# Altium PCB PCB模版.PcbDoc
Units mm, origin at the board's own origin, x right, y up, seen from the top; angles counter-clockwise.
Board outline 122.4 x 87.4 mm, 2 copper layers (Top Layer, Bottom Layer); 90 components, 1 nets, 321 pads, 148 vias.
Unrouted connection lines stored in the file: 96.
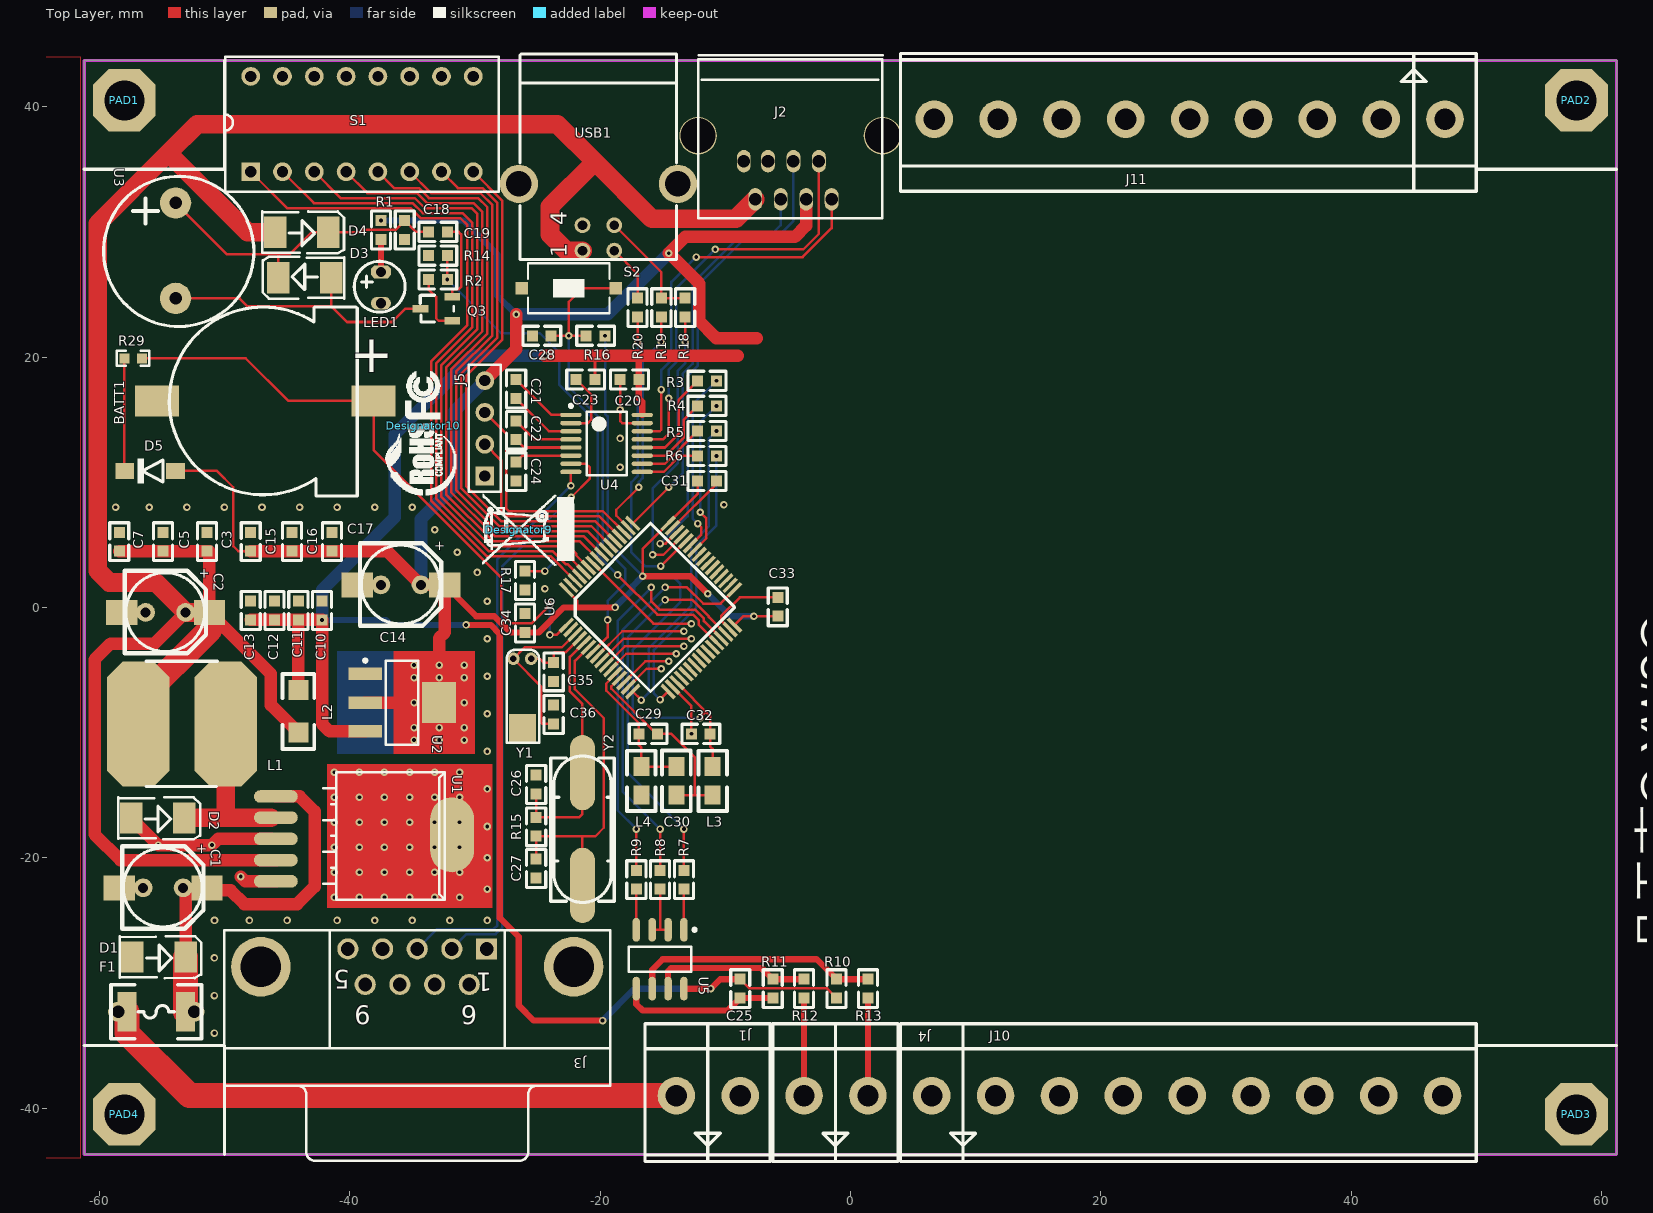
[diagram p0: Top Layer view]
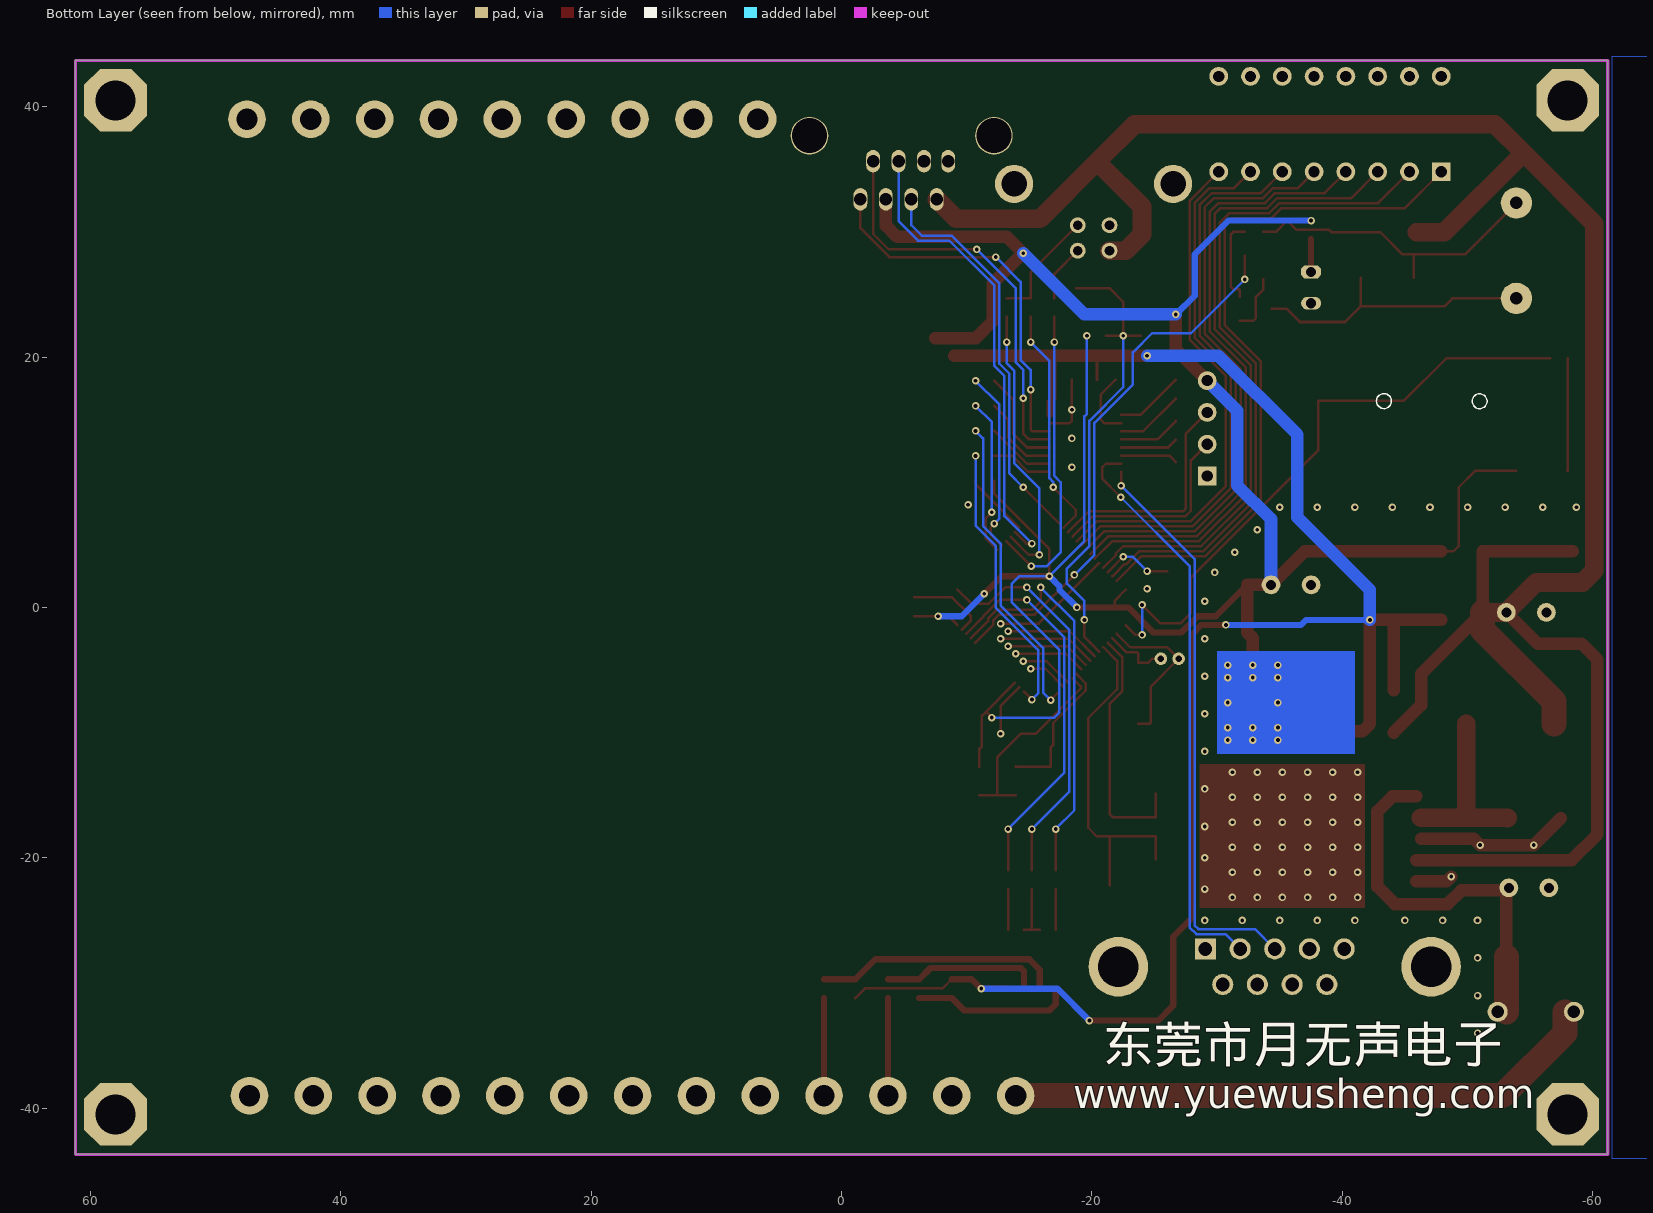
[diagram p1: Bottom Layer view, seen from below]

## Layer stack, top to bottom
Top Layer: signal copper 0.0356
Dielectric: dielectric 0.32, FR-4, Dk 4.8
Bottom Layer: signal copper 0.0356

## Board outline
-61.2,-43.7 61.2,-43.7 61.2,43.7 -61.2,43.7

## Design rules (kind name [scope] priority, off if disabled: settings)
Clearance [(InPadClass('All Pads')) vs InPolygon] p1: gap=0.3
Clearance Clearance_1 [All] p2: gap=0.2
ComponentClearance [All] p1 off: gap=0.254 collisioncheckmode=3 verticalgap=0.254 showdistances=FALSE
PlaneConnect [All] p1: planeconnectstyle=Relief reliefexpansion=0 reliefentries=4 reliefconductorwidth=0.3 reliefairgap=0.508
PolygonConnect PolygonConnect_1 [All vs IsComponentPad] p1: connectstyle=Relief reliefconductorwidth=0.3 reliefentries=4 polygonreliefangle="90 Angle" airgapwidth=0.3
PolygonConnect [All] p2: connectstyle=Direct reliefconductorwidth=0.3 reliefentries=4 polygonreliefangle="90 Angle" airgapwidth=0.3
RoomDefinition 八进八出 [InComponentClass('八进八出')] p1: confinementstyle=ConfineIn formatcopy=TRUE lockcomponents=FALSE outline -62,-44.5 62,-44.5 62,44.5 -62,44.5
RoutingVias [All] p1: holewidth=0.3 width=0.6 viastyle="Through Hole" minholewidth=0.3 minwidth=0.6 maxholewidth=0.3 maxwidth=0.6
SolderMaskExpansion [All] p1: expansion=0.102
Width [All] p1: maxlimit=2 minlimit=0.16 preferedwidth=0.2 minimp=50.000000 maximp=50.000000 favimp=50.000000
26 further rules are at their usual default settings.

## Components (designator, comment, footprint, x,y, rotation, side; value= is the part's Value field where it differs from the comment)
BATT1 "CR1220" MINI-BAT -38.1,16.5 r180 top
C1 "680UF/50V" 电解电容 -54.9,-22.4 r0 top (schematic designator C34)
C2 "220UF/25V" 电解电容 -54.7,-0.4 r0 top (schematic designator C32)
C3 "104" 0603A -51.4,6 r270 top (schematic designator C18)
C5 "104" 0603A -54.9,6 r270 top (schematic designator C20)
C7 "104" 0603A -58.4,6 r270 top (schematic designator C22)
C10 "104" 0603A -42.2,-1 r90 top (schematic designator C25)
C11 "104" 0603A -44.1,-1 r90 top (schematic designator C26)
C12 "104" 0603A -46,-1 r90 top (schematic designator C27)
C13 "14" 0603A -47.9,-1 r90 top (schematic designator C28)
C14 "470UF" 电解电容 -35.9,1.8 r0 top (schematic designator C33)
C15 "104" 0603A -47.9,4.5 r90 top (schematic designator C29)
C16 "104" 0603A -44.6,4.5 r90 top (schematic designator C30)
C17 "104" 0603A -41.4,4.5 r90 top (schematic designator C31)
C18 "104" 0603A -35.6,30.9 r270 top
C19 "104" 0603A -33.7,30 r0 top
C20 "CAP" 0603A -16.9,18.2 r180 top
C21 "104" 0603A -26.7,18.2 r270 top
C22 "104" 0603A -26.7,13.4 r90 top
C23 "104" 0603A -21.9,18.2 r0 top
C24 "104" 0603A -26.7,11.6 r270 top
C25 "CAP" 0603A -8.8,-31.2 r90 top
C26 "15" 0603A -25.1,-14.9 r90 top
C27 "15" 0603A -25.1,-20.1 r270 top
C28 "104" 0603A -23.9,21.7 r180 top
C29 "104" 0603A -16.9,-10.1 r0 top
C30 "1uF" 0805 -13.9,-12.7 r270 top
C31 "104" 0603A -12.2,10.1 r0 top
C32 "104" 0603A -11.2,-10.1 r180 top
C33 "104" 0603A -5.8,-0.7 r90 top
C34 "104" 0603A -26,-2 r90 top
C35 "15" 0603A -23.7,-5.9 r90 top
C36 "15" 0603A -23.7,-7.8 r270 top
D1 "5819" 贴片二极管 -51.8,-28 r0 top (schematic designator D3)
D2 "IN5824" 贴片二极管 -51.9,-16.9 r0 top
D3 "4148" 贴片二极管 -47,26.4 r180 top
D4 "5819" 贴片二极管 -40.4,29.9 r0 top
D5 "4148" DIODE_SOP -53.9,10.9 r180 top
Designator9 "" HS -26.5,6.2 r90 top
Designator10 "" fc -34.1,14.5 r90 top
F1 "3A" 自恢复保险丝 -57.8,-32.3 r0 top
J1 "CON2" CON2*5.1 -13.9,-39 r180 top
J2 "CON8" "od-rj45 - duplicate" -1.5,32.6 r180 top
J3 "D Connector 9" DSUB1.385-2H9 -34.6,-38.2 r180 top
J4 "CON2" CON2*5.1 -3.7,-39 r180 top
J5 "USART" HDR1X4 -29.2,10.5 r90 top
J10 "CON9" CON9*5.1 6.5,-39 r180 top
J11 "CON9" CON9*5.1 47.5,39 r0 top
L1 "33UH" SMD-100 -53.4,-9.3 r0 top (schematic designator L2)
L2 "100UH" 1206C -44.1,-6.6 r270 top (schematic designator L1)
L3 "100uH" 0805 -11,-12.714 r270 top
L4 "100uH" 0805 -16.7,-15 r90 top
LED1 "LED" LED2.5 -37.5,26.8 r90 top
PAD1 "PAD" PAD -58,40.5 r0 top
PAD2 "PAD" PAD 58,40.5 r0 top
PAD3 "PAD" PAD 58,-40.5 r0 top
PAD4 "PAD" PAD -58,-40.5 r0 top
Q3 "9013" SOT23 -31.8,22.9 r90 top
R1 "1K" 0603A -37.5,30.9 r270 top
R2 "1K" 0603A -32.2,26.2 r180 top
R3 "33" 0603A -10.7,18.1 r180 top
R4 "33" 0603A -10.7,16.1 r180 top
R5 "33" 0603A -10.7,14.1 r180 top
R6 "33" 0603A -10.7,12.1 r180 top
R7 "33" 0603A -13.3,-21 r270 top
R8 "33" 0603A -15.2,-21 r270 top
R9 "33" 0603A -17.1,-21 r270 top
R10 "100K" 0603A -1.1,-29.7 r270 top
R11 "100K" 0603A -6.2,-29.7 r270 top
R12 "33" 0603A -3.7,-29.7 r270 top
R13 "33" 0603A 1.4,-29.7 r270 top
R14 "103" 0603A -33.7,28.1 r0 top (schematic designator R25)
R15 "105" 0603A -25.1,-16.776 r270 top (schematic designator R22)
R16 "103" 0603A -19.6,21.7 r180 top (schematic designator R23)
R17 "103" 0603A -26,1.4 r90 top (schematic designator R24)
R18 "10" 0603A -13.2,24.7 r270 top
R19 "1.5K" 0603A -15.1,23.2 r90 top
R20 "10" 0603A -17,23.2 r90 top
R29 "1.5K" 0603P -56.6,19.9 r180 top
S1 "SW DIP-8" DIP-16-KEY -47.9,34.8 r0 top
S2 "RESRT" SW-PB2 -22.5,25.5 r180 top
U1 "LM2596" TO-263-5 -45.2,-15.1 r270 top (schematic designator U97)
U2 "SP1117" SOT223 -35.8,-7.6 r0 top (schematic designator U98)
U3 "蜂鸣器" 蜂鸣器 -53.9,28.5 r90 top
U4 "SP3232" TSSOP16 -19.476,13.1 r0 top
U5 "SP485" SO8_L -15.2,-28.1 r270 top
U6 "stm32f1xRxT" LQFP64 -24.1,0 r45 top
USB1 "USB" USB-B3 -21.4,28.5 r90 top
Y1 "32768" XL32 -25.5,-4.1 r270 top
Y2 "25M" XTALV-49USMD -21.4,-22.2 r90 top

## Footprints (in the part's own frame and the unit in brackets; to place one, negate y for a bottom-side part, rotate by r counter-clockwise, add the part's x,y. Pads: shape width x height; smd on the part's side, far side on the other; paste and mask are expansions set on the pad)
0603A [mm]
  rect 0.88x0.88 smd: 1(0,0) 2(1.5,0)
  silkscreen extent -0.76,-0.76 2.26,0.76
0603P [mm]
  rect 0.8x0.8 smd: 1(0,0) 2(1.4,0)
  silkscreen extent -0.6,-0.6 2,0.6
0805 [mil]
  rect 60x50 smd: 1(0,0) 2(90,0)
  silkscreen extent -50,-45 140,45
1206C [mm]
  rect 1.6x1.6 smd: 1(0,0) 2(3.4,0)
  silkscreen extent -1.27,-1.27 4.7,1.27
CON2*5.1 [mm]
  round 3 hole 1.7: 1(0,0) 2(-5.1,0)
  silkscreen extent -7.5,-5.75 2.5,5.25
CON9*5.1 [mm]
  round 3 hole 1.7: 1(0,0) 2(-5.1,0) 3(-10.2,0) 4(-15.3,0) 5(-20.4,0) 6(-25.5,0) 7(-30.6,0) 8(-35.7,0) 9(-40.8,0)
  silkscreen extent -43.5,-5.75 2.5,5.25
DIODE_SOP [mm]
  rect 1.5x1.3 smd: 1(0,0) 2(4.064,0)
  silkscreen extent 1.02,-1.02 3.05,1.02
DIP-16-KEY [mm] "DIP; 16 Leads; Row Spacing 7.62 mm; Pitch 2.54 mm"
  rect 1.5x1.5 hole 0.9: 1(0,0)
  round 1.5 hole 0.9: 2(2.54,0) 3(5.08,0) 4(7.62,0) 5(10.16,0) 6(12.7,0) 7(15.24,0) 8(17.78,0) 9(17.78,7.62) 10(15.24,7.62) 11(12.7,7.62) 12(10.16,7.62) 13(7.62,7.62) 14(5.08,7.62) 15(2.54,7.62) 16(0,7.62)
  silkscreen extent -2.05,-1.59 19.83,9.2
DSUB1.385-2H9 [mm] "Connector; D Subminiature; 9 Position; Right Angle; Pitch 1.385 mm"
  rect 1.69x1.69 hole 1.09: 1(-5.54,-10.92)
  round 1.69 hole 1.09: 2(-2.77,-10.92) 3(0,-10.92) 4(2.77,-10.92) 5(5.54,-10.92) 6(-4.155,-8.08) 7(-1.385,-8.08) 8(1.385,-8.08) 9(4.155,-8.08)
  round 4.76 hole 3.26: 10(-12.495,-9.5) 11(12.495,-9.5)
  silkscreen extent -15.4,-12.4 15.4,6
fc [mm]
  silkscreen extent -5.53,-2.62 4.36,3
HDR1X4 [mm] "Connector; Header; 4 Position"
  rect 1.5x1.5 hole 0.9: 1(0,0)
  round 1.5 hole 0.9: 2(2.54,0) 3(5.08,0) 4(7.62,0)
  silkscreen extent -1.27,-1.27 8.89,1.27
HS [mm]
  silkscreen extent -2.87,-4.39 2.87,2.87
LED2.5 [mil]
  oct 40x63 hole 32: A(0,0)
  oval 40x63 hole 32: K(-98.42,0)
  silkscreen extent -126,-76 34,84
LQFP64 [mm]
  rect 1.5x0.3 smd: 1(0,-2) 2(0,-2.5) 3(0,-3) 4(0,-3.5) 5(0,-4) 6(0,-4.5) 7(0,-5) 8(0,-5.5) 9(0,-6) 10(0,-6.5) 11(0,-7) 12(0,-7.5) 13(0,-8) 14(0,-8.5) 15(0,-9) 16(0,-9.5) 33(11.5,-9.5) 34(11.5,-9) 35(11.5,-8.5) 36(11.5,-8) 37(11.5,-7.5) 38(11.5,-7) 39(11.5,-6.5) 40(11.5,-6) 41(11.5,-5.5) 42(11.5,-5) 43(11.5,-4.5) 44(11.5,-4) 45(11.5,-3.5) 46(11.5,-3) 47(11.5,-2.5) 48(11.5,-2)
  rect 0.3x1.5 smd: 17(2,-11.5) 18(2.5,-11.5) 19(3,-11.5) 20(3.5,-11.5) 21(4,-11.5) 22(4.5,-11.5) 23(5,-11.5) 24(5.5,-11.5) 25(6,-11.5) 26(6.5,-11.5) 27(7,-11.5) 28(7.5,-11.5) 29(8,-11.5) 30(8.5,-11.5) 31(9,-11.5) 32(9.5,-11.5) 49(9.5,0) 50(9,0) 51(8.5,0) 52(8,0) 53(7.5,0) 54(7,0) 55(6.5,0) 56(6,0) 57(5.5,0) 58(5,0) 59(4.5,0) 60(4,0) 61(3.5,0) 62(3,0) 63(2.5,0) 64(2,0)
  silkscreen extent 1,-10.5 10.5,-1
MINI-BAT [mm]
  rect 3.5x2.5 smd: 1(-0.01,0.007) 2(17.29,0.007)
  silkscreen extent 1.29,-7.49 16.31,7.61
"od-rj45 - duplicate" [mm]
  oval 1.1x1.8 hole 1: 1(0,0) 2(1.016,-3.048) 3(2.032,0) 4(3.048,-3.048) 5(4.064,0) 6(5.08,-3.048) 7(6.096,0) 8(7.012,-3.048)
  round 3 hole 2.8: 8(-4.064,-5.08) 8(10.668,-5.08)
  silkscreen extent -4.1,-11.53 10.67,1.52
PAD [mm]
  oct 5x5 hole 3.2: 1(0,0)
SMD-100 [mm]
  oct 5x10 smd: 1(-3.5,0) 2(3.5,0)
  silkscreen extent -2.85,-5 2.84,5
SO8_L [mm] "SOIC, 8-Leads, Body 4.9x3.9mm, Pitch 1.27mm, IPC High Density"
  oval 1.9x0.6 smd: 1(-2.35,1.905) 2(-2.35,0.635) 3(-2.35,-0.635) 4(-2.35,-1.905) 5(2.35,-1.905) 6(2.35,-0.635) 7(2.35,0.635) 8(2.35,1.905)
  silkscreen extent -2.47,-2.5 1,2.88, body extent -2,-2.5 2,2.5, height 1.75
SOT23 [mm]
  rect 0.6x1.27 smd: 1(0,0) 2(1.905,0) 3(0.965,2.54)
  silkscreen extent -0.11,-0.13 2.04,2.56
SOT223 [mm] "SOT223, 4-Leads, Body 6.5x3.5mm, Pitch 2.3mm, Lead Span 7mm, IPC Low Density"
  rect 2.7x1 smd: 1(-2.95,2.3) 2(-2.95,0) 3(-2.95,-2.3)
  rect 2.7x3.3 smd: 4(2.95,0)
  silkscreen extent -3.07,-3.35 1.3,3.47, body extent -1.85,-3.35 1.85,3.35, height 1.7
SW-PB2 [mm]
  rect 1x1 smd: 1(-3.75,0) 2(3.75,0)
  silkscreen extent -3.25,-2 3.25,2
TO-263-5 [mm]
  oval 1x3.5 smd: 1(0,-0.691) 2(1.693,-0.691) 3(3.387,-0.691) 4(5.08,-0.691) 5(6.773,-0.691)
  oval 6x3.5 smd: 3(3.064,13.384)
  silkscreen extent -1.93,3.08 8.23,12.8
TSSOP16 [mm] "TSOP, 16-Leads, Body 5x4.4mm, Pitch 0.65mm, IPC Medium Density"
  oval 1.7x0.35 smd: 1(-2.85,2.275) 2(-2.85,1.625) 3(-2.85,0.975) 4(-2.85,0.325) 5(-2.85,-0.325) 6(-2.85,-0.975) 7(-2.85,-1.625) 8(-2.85,-2.275) 9(2.85,-2.275) 10(2.85,-1.625) 11(2.85,-0.975) 12(2.85,-0.325) 13(2.85,0.325) 14(2.85,0.975) 15(2.85,1.625) 16(2.85,2.275)
  silkscreen extent -2.97,-2.55 1.6,3.12, body extent -2.25,-2.55 2.25,2.55, height 1.1
USB-B3 [mil]
  round 50 hole 30: 1(0,0) 2(0,-100) 3(80,-100) 4(80,0)
  round 120 hole 80: 5(210,200) 6(210,-300)
  silkscreen extent -28,-295 618,197
XL32 [mm]
  round 1 hole 0.5: 1(0,0) 2(0,-1.422)
  rect 2.34x2.184 smd: ""(5.588,-0.686)
  silkscreen extent -0.71,-1.96 6.71,0.64
XTALV-49USMD [mm]
  oval 6x2 smd: 1(0,0) 2(9,0)
  silkscreen extent -1.37,-2.54 10.33,2.54
电解电容 [mm]
  round 1.5 hole 0.8: 1(1.6,0) 2(-1.6,0)
  rect 2.5x2 smd: 1(3.5,0) 2(-3.5,0)
  silkscreen extent -3.27,-3.27 3.22,3.33
自恢复保险丝 [mm]
  round 1.6 hole 1: 1(-0.7,0) 2(5.4,0)
  rect 1.524x3.175 smd: 1(0,0) 2(4.699,0)
  silkscreen extent -1.27,-2.16 5.97,2.16
蜂鸣器 [mm]
  round 2.5 hole 1: 1(3.81,0) 2(-3.81,0)
  silkscreen extent -6.06,-6.25 5.94,5.75
贴片二极管 [mm]
  rect 1.8x2.5 smd: A(-5.55,0.075) K(-1.3,0.075)
  silkscreen extent -6.58,-1.61 -0.05,1.73

## Part data
BATT1: library part Battery
C1 C2 C14: library part "CAPACITOR POL", "Capacitor"
C3 C5 C7 C10 C11 C12 C13 C15 C16 C17 C18 C19 C21 C22 C23 C24 C28 C31 C32 C33 C34: library part CAP, "Capacitor"
C20 C25: "Capacitor"
C26 C27 C29 C30 C35 C36: library part C
D1 D3 D4: library part 二极管
D2: library part 肖特基二极管
D5: library part D, "1N4148"
Designator9 Designator10: library part PAD
F1: library part "Fuse 1", "Fuse"
J3: "Receptacle Assembly, 9 Position, Right Angle"
J5: library part "Header 4", "Header, 4-Pin"
L1 L2: library part L1
L3 L4 R18 R19 R20 R29: library part R
Q3: library part NPN
R1 R2 R3 R4 R5 R6 R7 R8 R9 R10 R11 R12 R13 R14 R15 R16 R17: library part RES2
S1: "DIP Switch, 8 Position, SPST"
S2: library part SW-PB
U4: library part SP3232EEA
USB1: library part "HEADER 3X2"
Y1 Y2: library part XTAL, "Crystal Oscillator"

## Via types
v1: diameter 0.6, hole 0.3, Top Layer to Bottom Layer, 148 vias

## Nets (pads, with @x,y where several pads share a name; then routed paths per layer and width w, separated by ;. In a path a pad name is that pad's centre, name@x,y a point inside that pad or via, vN(x,y) a via of type N, cw(c..) or ccw(c..) an arc to the next point about the centre after c; other vN are vias at no path point)
GND: BATT1.2 C1.2 C2.2 C3.1 C5.1 C7.1 C10.2 C11.2 C12.2 C13.2 C14.2 C15.2 C16.2 C17.2 C18.2 C19.2 C20.2 C24.2 C25.1 C26.2 C27.2 C28.2 C31.2 C32.2 C33.2 C34.2 C35.1 C36.1 D1.A D2.A J1.2 J2.6 J2.8 J3.5 J3.10 J3.11 J5.1 J10.9 J11.1 L4.1 LED1.K PAD1.1 PAD2.1 PAD3.1 PAD4.1 Q3.2 R11.2 R14.1 R17.1 S1.9 S1.10 S1.11 S1.12 S1.13 S1.14 S1.15 S1.16 S2.2 U1.3 U1.5 U2.1 U4.15 U5.5 U6.18 U6.31 U6.47 U6.63 USB1.4 USB1.5 USB1.6 | length 55.9
  Top Layer w0.2: C19.2 -31.3,30 -31.1,29.8 -31.1,25.6 -31.3,25.4 -31.76,25.4 -31.8,25.36 Q3.2 ; C20.2 -18.4,14.9 -18.225,14.725 U4.15 ; U6.18 -12.7,-7.864 v1(-12.7,-10.1) ; U6.47 -10.7,9.864 C31.2 ; U6.31 -10.328,-1.044 -10.328,-0.7 -8.828,0.8 C33.2
  Top Layer w0.5: U5.5 -17.105,-31.695 -16.6,-32.2 -9.8,-32.2 C25.1 R11.2
  Top Layer w1: D2.A v1(-55.295,-18.98) v1(-51,-18.98) -50.507,-18.487 U1.3@-46.291,-18.487 ; v1(-48.7,-21.5) -48.327,-21.873 U1.5
  other v1: -50.8,-34 -50.8,-31 -50.8,-28 -50.795,-25 -48,-25 -45,-25 -41,-25 -38,-25 -35,-25 -32,-25 -29,-25 -41.216,-23.164 -39.216,-23.164 -37.216,-23.164 -35.216,-23.164 -33.216,-23.164 -31.216,-23.164 -29,-22.5 -41.216,-21.164 -39.216,-21.164 -37.216,-21.164 -35.216,-21.164 -33.216,-21.164 -31.216,-21.164 -29,-20 -41.216,-19.164 -39.216,-19.164 -37.216,-19.164 -35.216,-19.164 -33.216,-19.164 -31.216,-19.164 -29,-17.5 -41.216,-17.164 -39.216,-17.164 -37.216,-17.164 -35.216,-17.164 -33.216,-17.164 -31.216,-17.164 -41.216,-15.164 -39.216,-15.164 -37.216,-15.164 -35.216,-15.164 -33.216,-15.164 -31.216,-15.164 -29,-14.5 -41.216,-13.164 -39.216,-13.164 -37.216,-13.164 -35.216,-13.164 -33.216,-13.164 -31.216,-13.164 -29,-11.5 -29,-8.5 -29,-5.5 -29,-2.5 -29,0.5 -24.4,1.5 -29.8,2.8 -31.4,4.4 -33.2,6.2 -58.7,8 -56,8 -53,8 -50,8 -47,8 -44,8 -41,8 -38,8 -35,8 -10.1,8.2 -18.4,11.2 -18.4,13.5 -18.4,15.8
pads on no net: BATT1.1 C1.1 C2.1 C3.2 C5.2 C7.2 C10.1 C11.1 C12.1 C13.1 C14.1 C15.1 C16.1 C17.1 C18.1 C19.1 C20.1 C21.1 C21.2 C22.1 C22.2 C23.1 C23.2 C24.1 C25.2 C26.1 C27.1 C28.1 C29.1 C29.2 C30.1 C30.2 C31.1 C32.1 C33.1 C34.1 C35.2 C36.2 D1.K D2.K D3.A D3.K D4.A D4.K D5.1 D5.2 F1.1 F1.2 J1.1 J2.1 J2.2 J2.3 J2.4 J2.5 J2.7 J3.1 J3.2 J3.3 J3.4 J3.6 J3.7 J3.8 J3.9 J4.1 J4.2 J5.2 J5.3 J5.4 J10.1 J10.2 J10.3 J10.4 J10.5 J10.6 J10.7 J10.8 J11.2 J11.3 J11.4 J11.5 J11.6 J11.7 J11.8 J11.9 L1.1 L1.2 L2.1 L2.2 L3.1 L3.2 L4.2 LED1.A Q3.1 Q3.3 R1.1 R1.2 R2.1 R2.2 R3.1 R3.2 R4.1 R4.2 R5.1 R5.2 R6.1 R6.2 R7.1 R7.2 R8.1 R8.2 R9.1 R9.2 R10.1 R10.2 R11.1 R12.1 R12.2 R13.1 R13.2 R14.2 R15.1 R15.2 R16.1 R16.2 R17.2 R18.1 R18.2 R19.1 R19.2 R20.1 R20.2 R29.1 R29.2 S1.1 S1.2 S1.3 S1.4 S1.5 S1.6 S1.7 S1.8 S2.1 U1.1 U1.2 U1.4 U2.2 U2.3 U2.4 U3.1 U3.2 U4.1 U4.2 U4.3 U4.4 U4.5 U4.6 U4.7 U4.8 U4.9 U4.10 U4.11 U4.12 U4.13 U4.14 U4.16 U5.1 U5.2 U5.3 U5.4 U5.6 U5.7 U5.8 U6.1 U6.2 U6.3 U6.4 U6.5 U6.6 U6.7 U6.8 U6.9 U6.10 U6.11 U6.12 U6.13 U6.14 U6.15 U6.16 U6.17 U6.19 U6.20 U6.21 U6.22 U6.23 U6.24 U6.25 U6.26 U6.27 U6.28 U6.29 U6.30 U6.32 U6.33 U6.34 U6.35 U6.36 U6.37 U6.38 U6.39 U6.40 U6.41 U6.42 U6.43 U6.44 U6.45 U6.46 U6.48 U6.49 U6.50 U6.51 U6.52 U6.53 U6.54 U6.55 U6.56 U6.57 U6.58 U6.59 U6.60 U6.61 U6.62 U6.64 USB1.1 USB1.2 USB1.3 Y1. Y1.1 Y1.2 Y2.1 Y2.2
copper on no net: | length 2008.5
  Top Layer w0.2: -58,19.9 -58,10.936 -57.964,10.9 ; -56.6,19.9 -48.3,19.9 -44.893,16.493 -38.09,16.493 -38.09,12.565 -27.88,2.355 -27.88,-0.48 -27.111,-1.249 -25.445,-1.249 -24,0.196 v1(-24,0.2) ; -53.9,10.9 -50.6,10.9 -49.3,9.6 -49.3,4.9 -48.9,4.5 -47.9,4.5 ; -53.9,24.69 -48.79,24.69 -48.15,24.05 -41.45,24.05 ; -53.9,32.31 -49.79,28.2 -45.7,28.2 ; -47.9,34.8 -45,31.9 -35.128,31.9 -34.328,31.1 -31.166,31.1 -30.6,30.534 -30.6,22.56 -33.5,19.66 -33.5,8.54 -29.06,4.1 -23.957,4.1 -21.979,2.121 ; -45.7,26.325 -45.7,28.2 ; -45.36,34.8 -42.86,32.3 -34.963,32.3 -34.163,31.5 -31,31.5 -30.2,30.7 -30.2,22.394 -33.1,19.494 -33.1,8.706 -28.894,4.5 -23.792,4.5 -22.746,3.454 -22.604,3.454 -21.625,2.475 ; -42.82,34.8 -40.72,32.7 -34.797,32.7 -33.997,31.9 -30.266,31.9 -29.8,31.434 -29.8,22.228 -32.7,19.328 -32.7,8.872 -28.728,4.9 -22.495,4.9 -21.897,4.303 -21.897,4.161 -20.918,3.182 ; -41.45,26.325 -41.45,24.05 ; -40.28,34.8 -38.58,33.1 -34.631,33.1 -33.831,32.3 -30.1,32.3 -29.4,31.6 -29.4,22.063 -32.3,19.163 -32.3,9.037 -28.563,5.3 -21.622,5.3 -20.211,3.889 ; -37.74,34.8 -36.44,33.5 -34.466,33.5 -33.666,32.7 -29.731,32.7 -29,31.969 -29,21.897 -31.9,18.997 -31.9,9.203 -28.397,5.7 -21.315,5.7 -19.857,4.243 ; -35.2,34.8 -33.5,33.1 -29.566,33.1 -28.6,32.134 -28.6,21.731 -31.5,18.831 -31.5,9.369 -28.231,6.1 -21.008,6.1 -19.504,4.596 ; -34.34,23.865 -35.535,23.865 -36.6,22.8 -40.2,22.8 -41.45,24.05 ; -33.7,26.2 -33.7,25.4 -33.1,24.8 -33.1,23.1 -32.9,22.9 -31.8,22.9 ; -33.7,30 -34.7,30 -35.6,30.9 -36.34,30.16 -38.94,30.16 -39.125,29.975 -41.7,29.975 -43.025,29.975 -44.8,28.2 -45.7,28.2 ; -32.66,34.8 -31.36,33.5 -29.4,33.5 -28.2,32.3 -28.2,21.566 -31.1,18.666 -31.1,9.534 -28.066,6.5 -20.7,6.5 -19.15,4.95 ; v1(-32.2,26.2) -32.2,28.1 ; -30.12,34.8 -27.8,32.48 -27.8,21.4 -30.7,18.5 -30.7,9.7 -27.9,6.9 -20.393,6.9 -18.797,5.303 ; -29.2,13.04 -27.9,11.74 -27.9,7.725 -27.475,7.3 -20.086,7.3 -18.443,5.657 ; -29.2,15.58 -27.5,13.88 -27.5,7.891 -27.309,7.7 -19.779,7.7 -18.09,6.01 ; -26.7,11.6 -26.175,12.125 -22.326,12.125 ; -26.7,13.4 -26.075,12.775 -22.326,12.775 ; -26.7,14.9 -25.225,13.425 -22.326,13.425 ; -26.7,16.7 -24.075,14.075 -22.326,14.075 ; -26.7,18.2 -23.875,15.375 -22.326,15.375 ; -26,2.9 v1(-24.4,2.9) ; -25.5,-4.1 -24.8,-4.1 -24.5,-4.4 -23.7,-4.4 -23.7,-3.7 -23.6,-3.6 -22.75,-3.6 -21.625,-2.475 ; -25.1,-20.1 -25.1,-18.276 -21.4,-18.276 ; -25.1,-14.9 -25.1,-16.776 -21.676,-16.776 -21.4,-16.5 -21.4,-13.2 -21.4,-7.7 -22.4,-6.7 -22.4,-3.957 -21.272,-2.828 ; v1(-24,-2.2) -23.472,-2.2 -22.686,-1.414 ; -23.9,21.7 v1(-22.5,21.7) ; -23.7,-9.3 -24.6,-9.3 -24.7,-9.2 -24.7,-6.322 -26.922,-4.1 -26.022,-3.2 -23.057,-3.2 -21.979,-2.121 ; -22.686,1.414 -21.8,0.528 -21.8,0 ; v1(-22.497,4.054) -21.272,2.828 ; v1(-22.326,9.726) -22.326,10.825 ; -22.326,11.475 -21.1,11.475 -20.8,11.175 -20.8,10.3 v1(-22.3,8.8) ; -22.326,14.725 -20.975,14.725 -20.7,15 -20.7,17 -21.9,18.2 ; -21.4,-22.2 -21.4,-18.276 ; -21.1,21.7 v1(-22.5,21.7) ; -20.918,-3.182 -22,-4.264 -22,-6.534 -19.7,-8.834 -19.7,-17.6 -20.376,-18.276 -21.4,-18.276 ; -20.564,-3.536 -19.4,-2.371 v1(-19.4,-1) ; -20.564,3.536 -15.729,-1.3 v1(-12.7,-1.3) ; -20.4,18.2 -20.4,20.1 ; -20.211,-3.889 -18.222,-1.9 v1(-13.3,-1.9) ; -19.857,-4.243 -18.115,-2.5 v1(-12.7,-2.5) ; -19.504,-4.596 -18.008,-3.1 v1(-13.3,-3.1) ; -19.15,-4.95 -17.901,-3.7 v1(-13.9,-3.7) ; -18.86,28.5 -17,26.64 -17,24.7 ; -18.86,30.532 -15.1,26.772 -15.1,24.7 -13.2,24.7 ; -18.797,-5.303 -18.797,-5.374 -19.5,-6.077 -19.5,-6.651 -16.9,-9.251 -16.9,-10.1 -16.9,-11 -16.7,-11.2 -16.7,-12.714 -13.914,-12.714 -13.9,-12.7 ; -18.75,25.5 -21.4,25.5 -22.5,24.4 v1(-22.5,21.7) ; v1(-18.6,2.6) -15.418,-0.582 -12.57,-0.582 -12.1,-1.051 -12.1,-1.393 -10.665,-2.828 ; -18.443,-5.657 -19.1,-6.314 -19.1,-6.485 -15.485,-10.1 -15.4,-10.1 -14.3,-10.1 -12.443,-11.957 -12.443,-15 ; -18.09,-6.01 -16.379,-4.3 v1(-14.5,-4.3) ; -17.736,-6.364 -16.272,-4.9 v1(-15.1,-4.9) ; -17.736,6.364 -18.7,7.328 -18.7,7.8 v1(-16.9,9.6) ; -17.382,-6.718 v1(-16.7,-7.4) ; -17.382,6.718 v1(-14.5,9.6) ; -17.1,-25.745 -17.1,-22.5 ; -17.1,-21 v1(-17.1,-17.7) ; v1(-17,21.2) -17,23.2 ; -16.626,10.825 -14.909,10.825 -13.634,12.1 -12.2,12.1 ; -16.626,11.475 -14.825,11.475 -12.2,14.1 ; -16.626,12.125 -14.741,12.125 -13.3,13.566 -13.3,15 -12.2,16.1 ; -16.626,12.775 -14.825,12.775 -13.7,13.9 -13.7,16.6 -12.2,18.1 ; -16.626,13.425 -14.975,13.425 -14.5,13.9 v1(-14.5,16.7) ; -16.626,14.075 -15.225,14.075 -15.1,14.2 v1(-15.1,17.4) ; v1(-16.6,2.5) -16.6,4.672 -14.554,6.718 -12.2,9.072 -12.2,10.1 ; v1(-15.9,1.6) -15.9,0.466 -15.253,-0.182 -12.404,-0.182 -11.7,-0.886 -11.7,-1.086 -10.311,-2.475 ; -15.835,-25.75 -15.2,-25.75 ; v1(-15.8,4.2) -14.95,4.2 -13.493,5.657 ; -15.2,-22.5 -15.2,-25.75 ; -15.2,-21 v1(-15.2,-17.7) ; v1(-15.2,-7.363) -14.554,-6.718 ; v1(-15.2,5.1) -14.757,5.1 -13.847,6.01 ; v1(-15.143,3.3) -13.14,5.303 ; v1(-15.1,21.2) -15.1,23.2 ; v1(-14.8,0.6) -12.62,0.6 -11.3,-0.72 -11.3,-0.779 -9.958,-2.121 ; v1(-14.8,1.6) -13.054,1.6 -11.754,0.3 -10.365,0.3 -9.251,1.414 ; -14.565,-25.75 -15.2,-25.75 ; -13.9,-14.986 -13.886,-15 -12.443,-15 ; -13.847,-6.01 -11.2,-8.657 -11.2,-10.1 -11.2,-11.1 -11,-11.3 -11,-12.714 ; -13.3,-25.745 -13.3,-22.5 ; -13.3,-21 v1(-13.3,-17.7) ; v1(-13.2,21.2) -13.2,23.2 ; -12.786,4.95 -11.9,5.836 -11.9,6.4 v1(-12.2,6.7) ; -12.433,4.596 -11.5,5.529 -11.5,7.1 v1(-12,7.6) ; v1(-12.317,27.983) -3.817,27.983 -1.5,30.3 -1.5,32.6 ; v1(-12,-8.8) -11.557,-8.357 ; -11,-15 -12.443,-15 ; v1(-10.8,28.6) -3.766,28.6 -2.516,29.85 -2.516,35.648 ; -9.251,-1.414 -8.537,-0.7 v1(-7.7,-0.7) -5.8,-0.7 ; -8.8,-29.7 -8.06,-30.44 -1.86,-30.44 -1.1,-31.2
  Top Layer w0.5: -37.5,26.8 -37.5,29.4 ; -32.4,1.8 -29.9,-0.7 -28.438,-0.7 -27.138,-2 -26,-2 -24.9,-2 -22.9,0 -21.8,0 v1(-18.8,0) ; v1(-30.7,-1.4) -28.728,-1.4 -28,-2.128 -28,-24.8 -26.5,-26.3 -26.5,-31.8 -25.3,-33 v1(-19.8,-33) ; -16.9,20.1 -16.9,18.2 -16.9,16.7 -16.626,16.426 -16.626,15.375 ; v1(-16.6,2.5) -12.8,2.5 v1(-11.4,1.1) ; -15.835,-30.45 -15.835,-28.935 -15,-28.1 -2.7,-28.1 -1.1,-29.7 1.4,-29.7 ; -14.565,-30.45 -14.565,-29.065 -14.3,-28.8 -7.1,-28.8 -6.2,-29.7 -3.7,-29.7 ; -13.295,-30.45 v1(-11.15,-30.45) -10.4,-29.7 -8.8,-29.7 ; -3.7,-39 -3.7,-31.2 ; -3.532,30.468 -3.532,30.499 ; 1.4,-39 1.4,-31.2
  Top Layer w1: -58.4,4.5 -51.2,4.5 -51.2,-0.4 -46.3,-5.3 -46.3,-7.8 -44.1,-10 ; -53.101,-27.925 -53.101,-22.599 -49.501,-22.599 -48.4,-23.7 -44.2,-23.7 -42.8,-22.3 -42.8,-16.3 -44,-15.1 -45.891,-15.1 ; -53.1,-0.4 -55.6,-2.9 -59.1,-2.9 -60.373,-4.173 -60.373,-18.127 -58.32,-20.18 -45.891,-20.18 ; -47.9,-1 -46,-1 -44.1,-1 ; -47.9,4.5 -44.6,4.5 -41.4,4.5 -37,4.5 -34.3,1.8 -32.4,1.8 -32.4,-2 -32.85,-2.45 v1(-32.85,-4.6) ; -44.1,-6.6 -44.1,-1 ; -38.75,-9.9 -41.6,-9.9 -42.2,-9.3 v1(-42.2,-1) -44.1,-1 ; -38.75,-7.6 v1(-34.85,-7.6) ; -29.2,18.12 -26.7,20.62 v1(-26.7,23.4) ; v1(-24.4,20.1) -20.4,20.1 -16.9,20.1 -9,20.1 ; -10.7,21.5 -7.5,21.5 ; -10.7,21.6 -10.8,21.6 -12.06,22.86 -12.06,25.86 v1(-14.5,28.3) -13.2,29.6 -4.431,29.6 -3.532,30.499 -3.532,32.6
  Top Layer w1.5: -53.2,-16.825 -53.2,-16.793 -49.9,-16.793 ; -51.2,-0.4 -53.1,-0.4 -55.5,2 -59.2,2 -60.123,2.923 -60.123,30.652 -54.475,36.3 ; -49.9,-9.3 -49.9,-16.793 ; -46.291,-16.793 -49.9,-16.793 ; -45.95,29.975 -48.15,29.975 -54.475,36.3 ; -21.4,28.5 -22.7,28.5 -24,29.8 -24,32 -20.4,35.6 ; -7.596,32.6 -9.146,31.05 -15.85,31.05 -20.4,35.6 ; -54.475,36.3 -52.175,38.6 -23.4,38.6 -20.4,35.6
  Top Layer w2: -57.8,-32.3 -57.8,-34 -52.8,-39 -13.9,-39 ; -56.9,-9.3 -56.9,-7.5 -51.2,-1.8 -51.2,-0.4 ; -53.101,-32.3 -53.101,-27.925
  Bottom Layer w0.2: -34.6,-27.28 -33.02,-25.7 -28.5,-25.7 -28.2,-25.4 -28.2,3.852 v1(-22.326,9.726) ; v1(-32.2,26.2) -27.9,21.9 -24.8,21.9 -23.266,20.366 -23.266,17.8 -20.2,14.734 -20.2,4.2 v1(-18.6,2.6) ; -31.83,-27.28 -30.65,-26.1 -28.334,-26.1 -27.8,-25.566 -27.8,3.3 v1(-22.3,8.8) ; v1(-24.4,2.9) -23.246,4.054 v1(-22.497,4.054) ; v1(-24,-2.2) v1(-24,0.2) ; v1(-22.5,21.7) -22.5,17.6 -19.8,14.9 -19.8,4.9 -18,3.1 -18,1.9 -19.4,0.5 v1(-19.4,-1) ; v1(-19.6,21.7) -19.6,15.466 -19.4,15.266 -19.4,5.3 v1(-16.6,2.5) -14.2,2.5 -13.6,1.9 -13.6,0.4 -17.4,-3.4 -17.4,-8.4 -17,-8.8 v1(-12,-8.8) ; v1(-17.1,-17.7) -18.6,-16.2 -18.6,-1.1 v1(-15.9,1.6) ; v1(-17,21.2) -17,10.5 -17.5,10 -17.5,4.4 -16.4,3.3 v1(-15.143,3.3) ; v1(-16.9,9.6) -16.9,10.034 -16.6,10.334 -16.6,19.7 v1(-15.1,21.2) ; v1(-16.7,-7.4) -16.1,-6.8 -16.1,-3.234 -12.7,0.166 -12.7,5.1 -11.3,6.5 -11.3,13.5 v1(-10.7,14.1) ; v1(-15.8,4.2) -15.8,9.5 -13.8,11.5 -13.8,18.9 -13.2,19.5 v1(-13.2,21.2) ; v1(-15.2,-17.7) -18.2,-14.7 -18.2,-1.8 v1(-14.8,1.6) ; v1(-15.2,-7.363) -15.7,-6.863 -15.7,-3.4 -12.3,0 -12.3,4.934 -10.7,6.534 v1(-10.7,12.1) ; v1(-15.2,5.1) -13,7.3 -13,18.5 -12.2,19.3 -12.2,25.7 -8.6,29.3 -6.1,29.3 -4.548,30.852 -4.548,35.648 ; v1(-15.1,17.4) -15.1,18.966 -14.3,19.766 -14.3,26 v1(-12.317,27.983) ; v1(-14.8,0.6) -17.8,-2.4 -17.8,-13.2 v1(-13.3,-17.7) ; v1(-14.5,9.6) -13.4,10.7 -13.4,18.666 -12.6,19.466 -12.6,25.866 -8.766,29.7 -6.4,29.7 -5.564,30.536 -5.564,32.6 ; v1(-14.5,16.7) -14.5,19 -13.9,19.6 -13.9,25.5 v1(-10.8,28.6) ; v1(-12.2,6.7) -12.6,7.1 -12.6,16.2 v1(-10.7,18.1) ; v1(-12,7.6) -12,14.8 v1(-10.7,16.1)
  Bottom Layer w0.5: v1(-42.2,-1) -37.1,-1 -36.7,-1.4 v1(-30.7,-1.4) ; v1(-37.5,30.9) -30.9,30.9 -28.2,28.2 -28.2,24.9 v1(-26.7,23.4) ; v1(-19.8,-33) -17.25,-30.45 v1(-11.15,-30.45) ; v1(-18.8,0) -17.4,1.4 -17.4,1.7 v1@-16.75,2.35 ; v1(-11.4,1.1) -9.6,-0.7 v1(-7.7,-0.7)
  Bottom Layer w1: v1(-42.2,-1) -42.2,1.4 -36.4,7.2 -36.4,13.8 -30.1,20.1 v1(-24.4,20.1) ; -34.3,1.8 -34.3,7.05 -31.6,9.75 -31.6,15.72 -29.2,18.12 ; v1(-26.7,23.4) -19.4,23.4 v1(-14.5,28.3)
  other v1: -34.85,-10.6 -32.85,-10.6 -30.85,-10.6 -34.85,-9.6 -32.85,-9.6 -30.85,-9.6 -30.85,-7.6 -34.85,-5.6 -32.85,-5.6 -30.85,-5.6 -34.85,-4.6 -30.85,-4.6

## Polygon pours and split planes (outlines as drawn)
GND on Bottom Layer "Bottom Layer-No Net" (solid, remove dead copper, pour order 4): -61.5,44 -61.5,-44 -68.9,-44 -68.9,44
GND on Top Layer "Bottom Layer-No Net" (solid, remove dead copper, pour order 3): -61.5,44 -61.5,-44 -67.8,-44 -67.8,44

## Keep-outs
Keep-Out Layer:
  the board outline again, w0.254

## Other copper
Top Layer:
  rectangle net GND: -41.8,-24 -28.6,-12.5
  rectangle: -36.5,-11.7 -30,-3.5
Bottom Layer:
  rectangle: -41,-11.7 -30,-3.5

## Silkscreen, mask and mechanical layers (free items; w line width, h text height)
Top Overlay:
  lines w0.254: -61.2,-35 -50,-35 -50,-43.7 ; -61.2,35 -50,35 -50,43.7 ; 50,-43.7 50,-35 61.2,-35 ; 50,43.7 50,35 61.2,35
  text "月无声® YWS®" at 66.9,-27.8 h5 r90
  text "阿波罗工业控制器" at 71.9,-29.1 h5 r90
Bottom Overlay:
  text "东莞市月无声电子" at -20.9,-37.3 h5
  text "www.yuewusheng.com" at -18.5,-40.8 h4
Top Solder:
  lines w1: -58.7,8 -35,8 -29,2 -29,0.5 ; -50.8,-34 -50.8,-25.005 -50.795,-25 -29,-25 -29,-2.5

## Dimensions
-61.2,35 to -61.2,-35 on Top Overlay
-50,43.7 to 50,43.7 on Top Overlay
-61.2,-43.7 to 61.2,-43.7 on Top Overlay
-61.2,43.7 to -61.2,-43.7 on Top Overlay

## Text inside footprints (layer, text, board x,y; h text height)
BATT1: Top Overlay "+" at -36.5,21.4 h3 r180
C1: Top Overlay "+" at -51.49,-19.74 h0.8 r90
C2: Top Overlay "+" at -51.29,2.26 h0.8 r90
C14: Top Overlay "+" at -32.49,4.46 h0.8 r90
J3: Top Overlay "1" at -28.6,-29.2 h1.5 r180; Top Overlay "5" at -40,-29 h1.5 r180; Top Overlay "9" at -38.3,-31.8 h1.5 r180; Top Overlay "6" at -29.8,-31.8 h1.5 r180
USB1: Top Overlay "4" at -22.67,30.532 h1.27 r90; Top Overlay "1" at -22.67,27.992 h1.27 r90